# EAGLE board porta OU F (EAGLE 6.1)
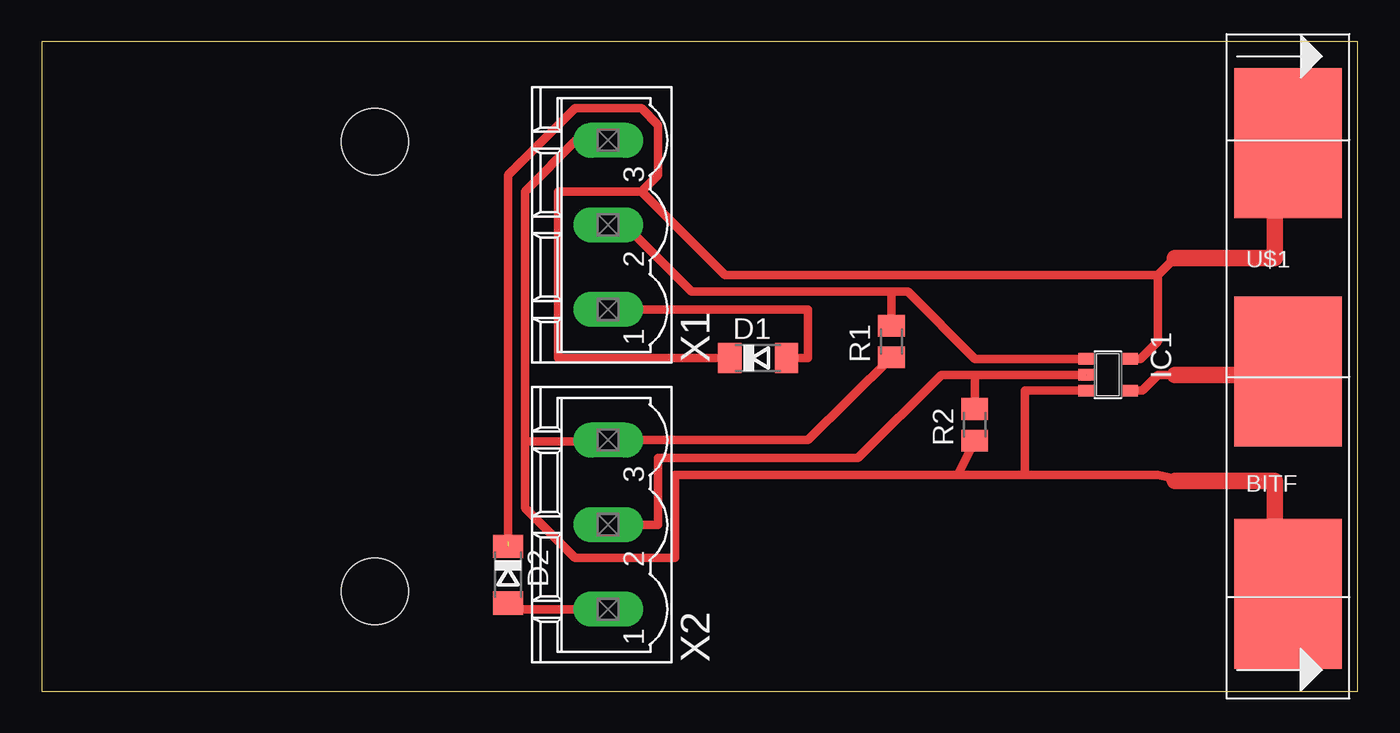
[diagram p0: board, top side]

Size 79 x 39 mm. Coordinates in mm from the lower left corner, seen from the top.
Outline: 0,0 79,0 79,39 0,39 0,0
Copper layers (1*16): Top 0.035mm / dielectric 1.5mm / Bottom 0.035mm
Design rules: minimum track width 10mil, minimum drill 24mil, track to track 8mil, track to pad 8mil, pad to pad 8mil, via to via 8mil, smd to smd 8mil, copper to edge 40mil, drill to drill 8mil, minimum pad ring 10mil, minimum via ring 8mil, stop-mask expansion 4mil, vias tented up to drill 0mil, thermal gap 10mil
Holes 4 mm at 20,33 20,6

## Footprints (pad centres in the part's own frame; a part is rotated, then mirrored left to right if it is on the bottom)
SOD80C = smd 1.4 x 1.8: A 1.7,0; C -1.7,0
SOT23-5 = smd 0.69 x 0.99: 1 -0.95,-1.29; 2 0,-1.29; 3 0.95,-1.29; 4 0.95,1.3; 5 -0.95,1.3
M0805 = smd 1.3 x 1.6: 1 -0.95,0; 2 0.95,0
BITM = smd 6.452 x 8.992: GND 3.81,-13.145; SIG 3.81,0.191; VCC 3.81,13.906
MSTBV3 = drill 1.397 long: 1 -5.08,0; 2 0,0; 3 5.08,0

## Placement (x,y rotation side)
D1  [SOD80C]  43,20 0 top
D2  [SOD80C]  28,7 270 top
IC1  74AHC1G32DBV  [SOT23-5]  64,19 270 top
R1  1M  [M0805]  51,21 90 top
R2  1M  [M0805]  56,16 90 top
U$1  BITF  [BITM]  71,19 0 top
X1  MSTBV3  [MSTBV3]  34,28 90 top
X2  MSTBV3  [MSTBV3]  34,10 90 top

## Library data of the parts
D1 D2 = diode
IC1 = 74xx-little-de
R1 R2 = rcl
U$1 = _Rada
X1 X2 = con-phoenix-508; MPN: MSTBV 2,5/3-GF-5.08; OC_FARNELL: 1792793; OC_NEWARK: 69R9846

## Nets
GND: IC1.3 R1.1 R2.1 U$1.GND X1.3 X2.3
N$1: D1.A X1.1
N$2: D2.A X2.1
N$7: IC1.4 U$1.SIG
SIG1: IC1.1 R1.2 X1.2
SIG2: IC1.2 R2.2 X2.2
VCC: D1.C D2.C IC1.5 U$1.VCC

## Tracks (layer width: path | path; a pad name or v marks a point on that pad's centre or on a via)
GND  (1 unrouted)
  Top 0.5: R2.1 55,13 | R1.1 46,15.08 X2.3 | IC1.3 59,18.05 59,13 | 29,15 34,15 | 55,13 38,13 38,8 32,8 29,11 29,15 | 55,13 59,13 | 59,13 67,13 68.62,12.62 | X1.3 32.08,33.08 29,30 29,15
  Top 1: U$1.GND 74,5.86 74,12.62 68.62,12.62 68,12.62
N$1
  Top 0.5: X1.1 46,22.92 46,20 D1.A
N$2
  Top 0.5: X2.1 28,4.92 D2.A
N$7
  Top 0.5: IC1.4 66.05,18.05 67,19 68,19
  Top 1: 68,19 75,19 U$1.SIG
SIG1
  Top 0.5: IC1.1 56,19.95 52,24 51,24 | R1.2 51,24 | X1.2 35,28 39,24 51,24
SIG2
  Top 0.5: IC1.2 56,19 | 56,19 R2.2 | 56,19 54,19 49,14 37,14 37,10 X2.2
VCC  (1 unrouted)
  Top 0.5: D1.C 31,20 31,30 36,30 | 36,30 41,25 67,25 | 36,30 37,31 37,34 36,35 32,35 28,31 28,9 | IC1.5 65.95,19.95 67,21 67,25 | 67,25 68,26
  Top 1: U$1.VCC 74,32.91 74,26 68,26